# EAGLE board AVRI2CIO_V0_3_LEVEL0 (EAGLE 6.5.0)
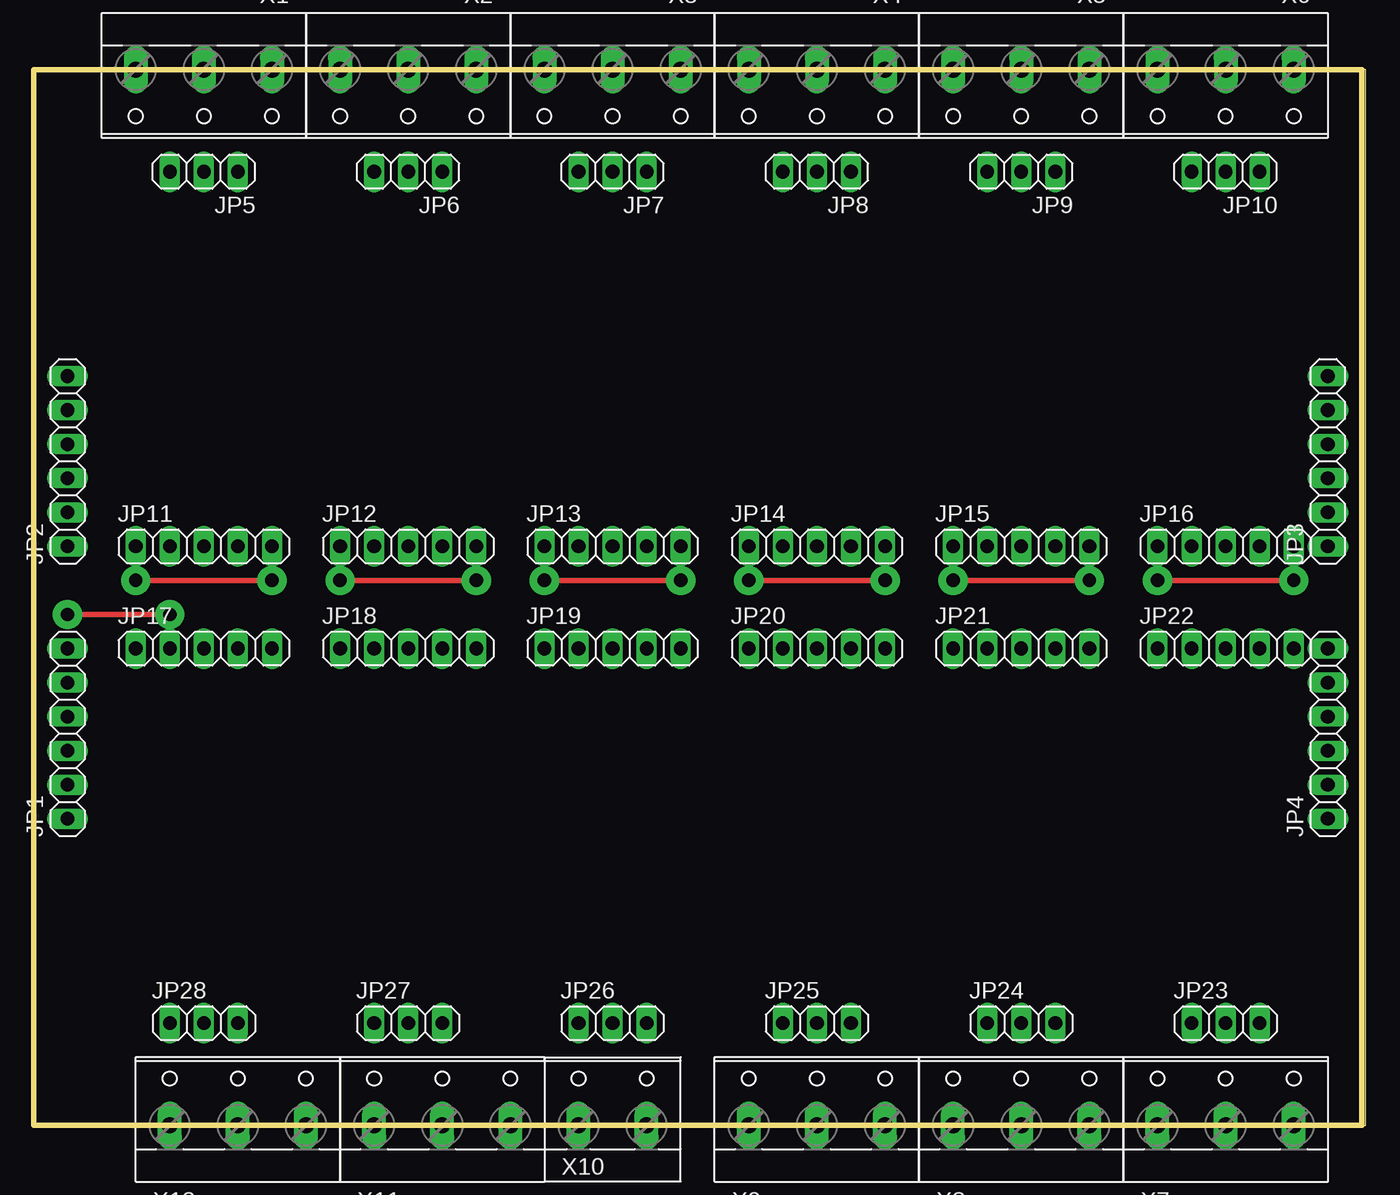
[diagram p0: board, top side]
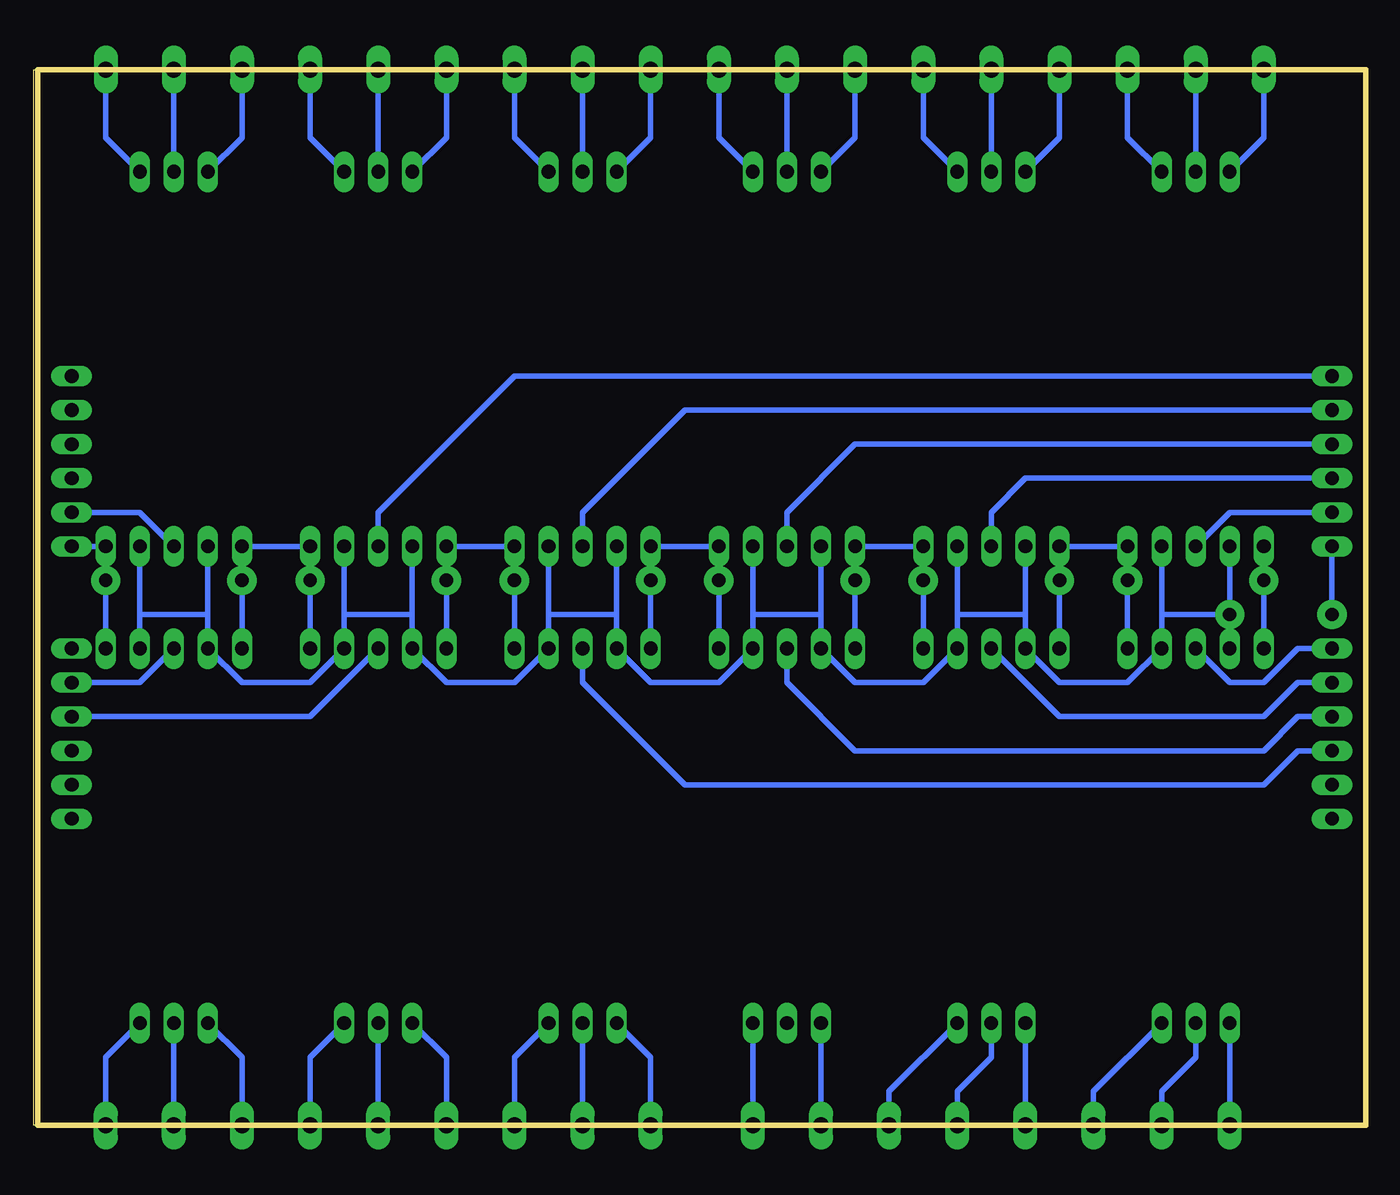
[diagram p1: board, bottom side, seen from below]

Size 99.36 x 78.74 mm. Coordinates in mm from the lower left corner, seen from the top.
Outline: 99.06,0 99.36,0 99.36,78.73 0,78.73
Outline: 0,78.73 0,78.74 99.06,78.74 99.06,0
Outline: 0,78.73 0,0 99.06,0
Copper layers (1*16): Top 0.035mm / dielectric 1.5mm / Bottom 0.035mm
Design rules "default": minimum track width 10mil, minimum drill 24mil, track to track 8mil, track to pad 8mil, pad to pad 8mil, via to via 8mil, smd to smd 8mil, copper to edge 40mil, drill to drill 8mil, minimum pad ring 10mil, minimum via ring 8mil, stop-mask expansion 4mil, vias tented up to drill 0mil, thermal gap 10mil

## Footprints (pad centres in the part's own frame; a part is rotated, then mirrored left to right if it is on the bottom)
1X06 = drill 1.016 long: 1 -6.35,0; 2 -3.81,0; 3 -1.27,0; 4 1.27,0; 5 3.81,0; 6 6.35,0
1X03 = drill 1.016 long: 1 -2.54,0; 2 0,0; 3 2.54,0
1X05 = drill 1.016 long: 1 -5.08,0; 2 -2.54,0; 3 0,0; 4 2.54,0; 5 5.08,0
W237-3E = drill 1.194 long: 1 -5.08,-0.635; 2 0,-0.635; 3 5.08,-0.635
W237-132 = drill 1.194 long: 1 -2.54,-0.635; 2 2.54,-0.635

## Placement (x,y rotation side)
JP1  [1X06]  2.54,29.21 90 top
JP2  [1X06]  2.54,49.53 90 top
JP3  [1X06]  96.52,49.53 90 top
JP4  [1X06]  96.52,29.21 90 top
JP5  [1X03]  12.7,71.12 180 top
JP6  [1X03]  27.94,71.12 180 top
JP7  [1X03]  43.18,71.12 180 top
JP8  [1X03]  58.42,71.12 180 top
JP9  [1X03]  73.66,71.12 180 top
JP10  [1X03]  88.9,71.12 180 top
JP11  [1X05]  12.7,43.18 0 top
JP12  [1X05]  27.94,43.18 0 top
JP13  [1X05]  43.18,43.18 0 top
JP14  [1X05]  58.42,43.18 0 top
JP15  [1X05]  73.66,43.18 0 top
JP16  [1X05]  88.9,43.18 0 top
JP17  [1X05]  12.7,35.56 0 top
JP18  [1X05]  27.94,35.56 0 top
JP19  [1X05]  43.18,35.56 0 top
JP20  [1X05]  58.42,35.56 0 top
JP21  [1X05]  73.66,35.56 0 top
JP22  [1X05]  88.9,35.56 0 top
JP23  [1X03]  88.9,7.62 0 top
JP24  [1X03]  73.66,7.62 0 top
JP25  [1X03]  58.42,7.62 0 top
JP26  [1X03]  43.18,7.62 0 top
JP27  [1X03]  27.94,7.62 0 top
JP28  [1X03]  12.7,7.62 0 top
X1  [W237-3E]  12.7,78.11 180 top
X2  [W237-3E]  27.94,78.11 180 top
X3  [W237-3E]  43.18,78.11 180 top
X4  [W237-3E]  58.42,78.11 180 top
X5  [W237-3E]  73.66,78.11 180 top
X6  [W237-3E]  88.9,78.11 180 top
X7  [W237-3E]  88.9,0.64 0 top
X8  [W237-3E]  73.66,0.64 0 top
X9  [W237-3E]  58.42,0.64 0 top
X10  [W237-132]  43.18,0.64 0 top
X11  [W237-3E]  30.48,0.64 0 top
X12  [W237-3E]  15.24,0.64 0 top

## Library data of the parts
JP1-JP28 = pinhead
X1-X12 = con-wago-508; OC_FARNELL: unknown; OC_NEWARK: unknown

## Nets
+5V: JP3.1 JP11.1 JP11.5 JP12.1 JP12.5 JP13.1 JP13.5 JP14.1 JP14.5 JP15.1 JP15.5 JP16.1 JP16.5 JP17.1 JP17.5 JP18.1 JP18.5 JP19.1 JP19.5 JP20.1 JP20.5 JP21.1 JP21.5 JP22.1 JP22.5
GND: JP2.1 JP11.2 JP11.4 JP12.2 JP12.4 JP13.2 JP13.4 JP14.2 JP14.4 JP15.2 JP15.4 JP16.2 JP16.4 JP17.2 JP17.4 JP18.2 JP18.4 JP19.2 JP19.4 JP20.2 JP20.4 JP21.2 JP21.4 JP22.2 JP22.4
N$1: JP2.2 JP11.3
N$2: JP2.3 JP12.3
N$3: JP1.4 JP19.3
N$4: JP2.4 JP13.3
N$5: JP2.5 JP14.3
N$6: JP2.6 JP15.3
N$7: JP1.6 JP17.3
N$8: JP1.5 JP18.3
N$9: JP4.5 JP22.3
N$10: JP4.4 JP21.3
N$11: JP3.2 JP16.3
N$12: JP1.3 JP20.3
N$13: JP10.2 X6.2
N$14: JP10.1 X6.1
N$15: JP10.3 X6.3
N$16: JP9.3 X5.3
N$17: JP9.2 X5.2
N$18: JP9.1 X5.1
N$19: JP8.3 X4.3
N$20: JP8.2 X4.2
N$21: JP8.1 X4.1
N$22: JP7.3 X3.3
N$23: JP7.2 X3.2
N$24: JP7.1 X3.1
N$25: JP6.3 X2.3
N$26: JP6.2 X2.2
N$27: JP6.1 X2.1
N$28: JP5.3 X1.3
N$29: JP5.2 X1.2
N$30: JP5.1 X1.1
N$31: JP28.3 X12.3
N$32: JP28.2 X12.2
N$33: JP28.1 X12.1
N$34: JP27.3 X11.3
N$35: JP27.2 X11.2
N$36: JP27.1 X11.1
N$37: JP25.3 X9.3
N$38: JP25.2 X9.2
N$39: JP25.1 X9.1
N$40: JP24.3 X8.3
N$41: JP24.2 X8.2
N$42: JP24.1 X8.1
N$43: JP23.3 X7.3
N$44: JP23.2 X7.2
N$45: JP23.1 X7.1
N$46: JP26.1 X10.1
N$47: JP26.3 X10.2

## Tracks (layer width: path | path; a pad name or v marks a point on that pad's centre or on a via)
+5V  (via drill 1 pad 2.18)
  Top 0.406: v7.62,40.64 v17.78,40.64 | v33.02,40.64 v22.86,40.64 | v38.1,40.64 v48.26,40.64 | v53.34,40.64 v63.5,40.64 | v68.58,40.64 v78.74,40.64 | v83.82,40.64 v93.98,40.64
  Bottom 0.406: JP17.5 v17.78,40.64 JP11.5 JP12.1 v22.86,40.64 JP18.1 | JP19.5 v48.26,40.64 JP13.5 JP14.1 v53.34,40.64 JP20.1 | JP20.5 v63.5,40.64 JP14.5 JP15.1 v68.58,40.64 JP21.1 | JP21.5 v78.74,40.64 JP15.5 JP16.1 v83.82,40.64 JP22.1 | JP22.5 v93.98,40.64 JP16.5 JP3.1 | JP18.5 v33.02,40.64 JP12.5 JP13.1 v38.1,40.64 JP19.1 | JP17.1 v7.62,40.64 JP11.1
GND  (via drill 1 pad 2.18)
  Top 0.406: v2.54,38.1 v10.16,38.1
  Bottom 0.406: JP17.2 v10.16,38.1 | v10.16,38.1 15.24,38.1 | 15.24,38.1 JP17.4 17.78,33.02 22.86,33.02 JP18.2 25.4,38.1 | 25.4,38.1 30.48,38.1 | 30.48,38.1 JP12.4 | 30.48,38.1 JP18.4 33.02,33.02 38.1,33.02 JP19.2 40.64,38.1 | JP12.2 25.4,38.1 | JP13.2 40.64,38.1 | 45.72,38.1 JP19.4 48.26,33.02 53.34,33.02 JP20.2 55.88,38.1 | JP13.4 45.72,38.1 | 45.72,38.1 40.64,38.1 | JP11.4 15.24,38.1 | JP11.2 v10.16,38.1 | 60.96,38.1 JP14.4 JP20.4 | 60.96,38.1 JP20.4 | JP14.2 55.88,38.1 | 55.88,38.1 60.96,38.1 | 71.12,38.1 JP15.2 | JP15.4 76.2,38.1 | 76.2,38.1 JP21.4 78.74,33.02 83.82,33.02 JP22.2 86.36,38.1 | 76.2,38.1 71.12,38.1 | 86.36,38.1 JP16.2 | JP22.4 91.44,38.1 | JP16.4 91.44,38.1 | 91.44,38.1 86.36,38.1 | 71.12,38.1 JP21.2 68.58,33.02 63.5,33.02 JP20.4 | JP2.1 v2.54,38.1
N$1
  Bottom 0.406: JP2.2 10.16,45.72 JP11.3
N$2
  Bottom 0.406: JP2.3 25.4,48.26 27.94,45.72 JP12.3
N$3
  Bottom 0.406: JP1.4 5.08,30.48 7.62,27.94 38.1,27.94 43.18,33.02 JP19.3
N$4
  Bottom 0.406: JP2.4 38.1,50.8 43.18,45.72 JP13.3
N$5
  Bottom 0.406: JP2.5 50.8,53.34 58.42,45.72 JP14.3
N$6
  Bottom 0.406: JP2.6 63.5,55.88 73.66,45.72 JP15.3
N$7
  Bottom 0.406: JP1.6 5.08,35.56 7.62,33.02 10.16,33.02 JP17.3
N$8
  Bottom 0.406: JP1.5 5.08,33.02 7.62,30.48 22.86,30.48 JP18.3
N$9
  Bottom 0.406: JP4.5 91.44,33.02 JP22.3
N$10
  Bottom 0.406: JP4.4 78.74,30.48 JP21.3
N$11
  Bottom 0.406: JP3.2 91.44,45.72 JP16.3
N$12
  Bottom 0.406: JP1.3 5.08,27.94 7.62,25.4 50.8,25.4 58.42,33.02 JP20.3
N$13
  Bottom 0.406: JP10.2 X6.2
N$14
  Bottom 0.406: JP10.1 93.98,73.66 X6.1
N$15
  Bottom 0.406: JP10.3 83.82,73.66 X6.3
N$16
  Bottom 0.406: JP9.3 68.58,73.66 X5.3
N$17
  Bottom 0.406: JP9.2 X5.2
N$18
  Bottom 0.406: JP9.1 78.74,73.66 X5.1
N$19
  Bottom 0.406: JP8.3 53.34,73.66 X4.3
N$20
  Bottom 0.406: JP8.2 X4.2
N$21
  Bottom 0.406: JP8.1 63.5,73.66 X4.1
N$22
  Bottom 0.406: JP7.3 38.1,73.66 X3.3
N$23
  Bottom 0.406: JP7.2 X3.2
N$24
  Bottom 0.406: JP7.1 48.26,73.66 X3.1
N$25
  Bottom 0.406: JP6.3 22.86,73.66 X2.3
N$26
  Bottom 0.406: JP6.2 X2.2
N$27
  Bottom 0.406: JP6.1 33.02,73.66 X2.1
N$28
  Bottom 0.406: JP5.3 7.62,73.66 X1.3
N$29
  Bottom 0.406: JP5.2 X1.2
N$30
  Bottom 0.406: JP5.1 17.78,73.66 X1.1
N$31
  Bottom 0.406: X12.3 20.32,2.54 JP28.3
N$32
  Bottom 0.406: X12.2 15.24,2.54 12.7,5.08 JP28.2
N$33
  Bottom 0.406: JP28.1 X12.1
N$34
  Bottom 0.406: X11.3 35.56,2.54 JP27.3
N$35
  Bottom 0.406: X11.2 30.48,2.54 27.94,5.08 JP27.2
N$36
  Bottom 0.406: JP27.1 X11.1
N$37
  Bottom 0.406: JP25.3 63.5,5.08 X9.3
N$38
  Bottom 0.406: JP25.2 X9.2
N$39
  Bottom 0.406: JP25.1 53.34,5.08 X9.1
N$40
  Bottom 0.406: JP24.3 78.74,5.08 X8.3
N$41
  Bottom 0.406: JP24.2 X8.2
N$42
  Bottom 0.406: JP24.1 68.58,5.08 X8.1
N$43
  Bottom 0.406: JP23.3 93.98,5.08 X7.3
N$44
  Bottom 0.406: JP23.2 X7.2
N$45
  Bottom 0.406: JP23.1 83.82,5.08 X7.1
N$46
  Bottom 0.406: JP26.1 X10.1
N$47
  Bottom 0.406: JP26.3 X10.2